# Altium PCB Flight_Controller_PCB.PcbDoc
Units mm, origin at the board's own origin, x right, y up, seen from the top; angles counter-clockwise.
Board outline 52 x 49 mm, 4 copper layers (L1 (Sig), L2 (GND), L3 (GND), L4 (Sig)), stack 1.57 mm thick; 56 components, 34 nets, 244 pads, 103 vias.
Unrouted connection lines stored in the file: 1.
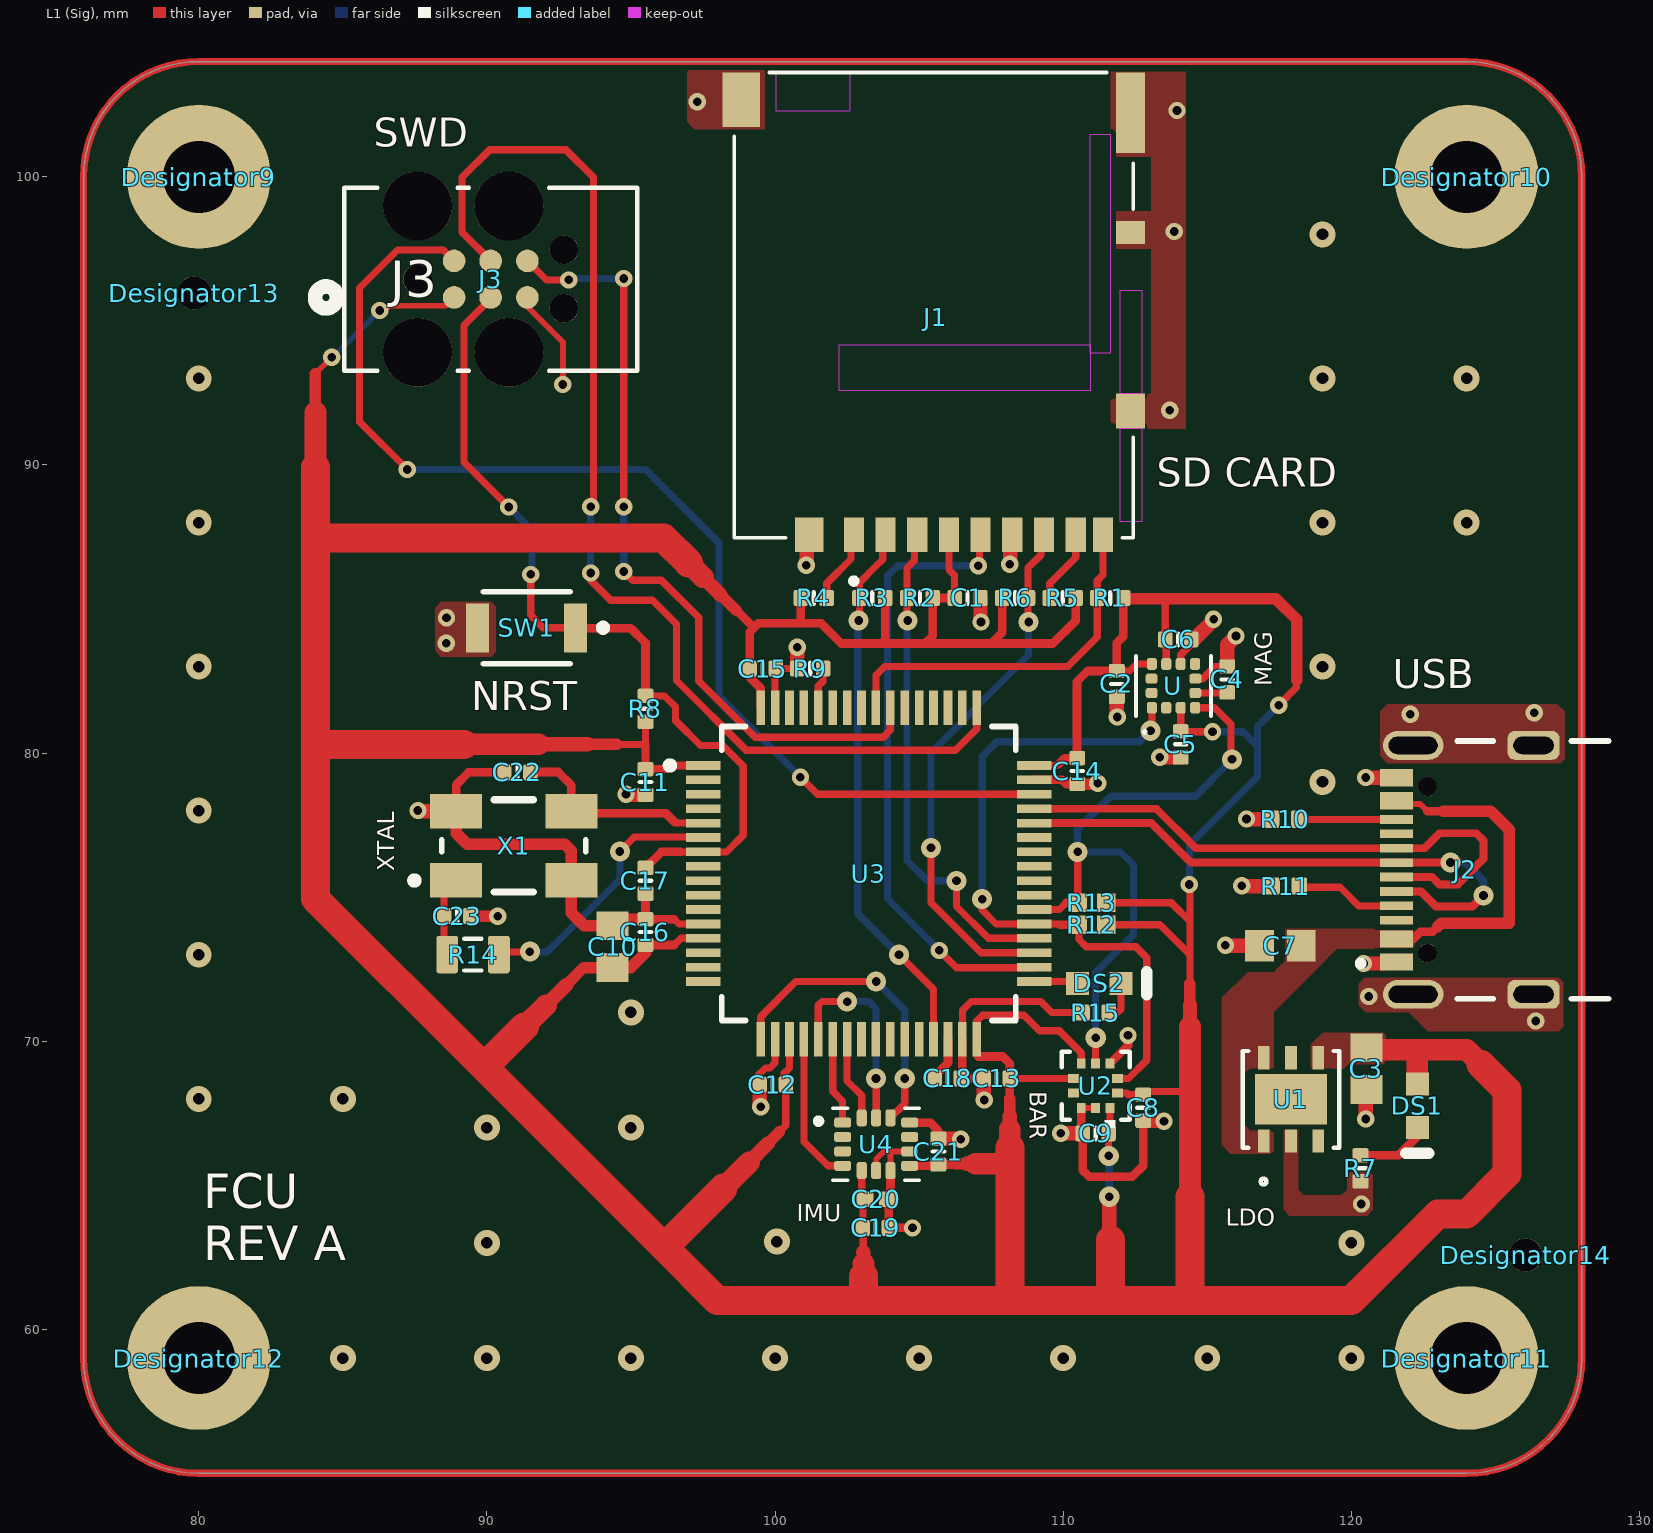
[diagram p0: L1 (Sig) view]
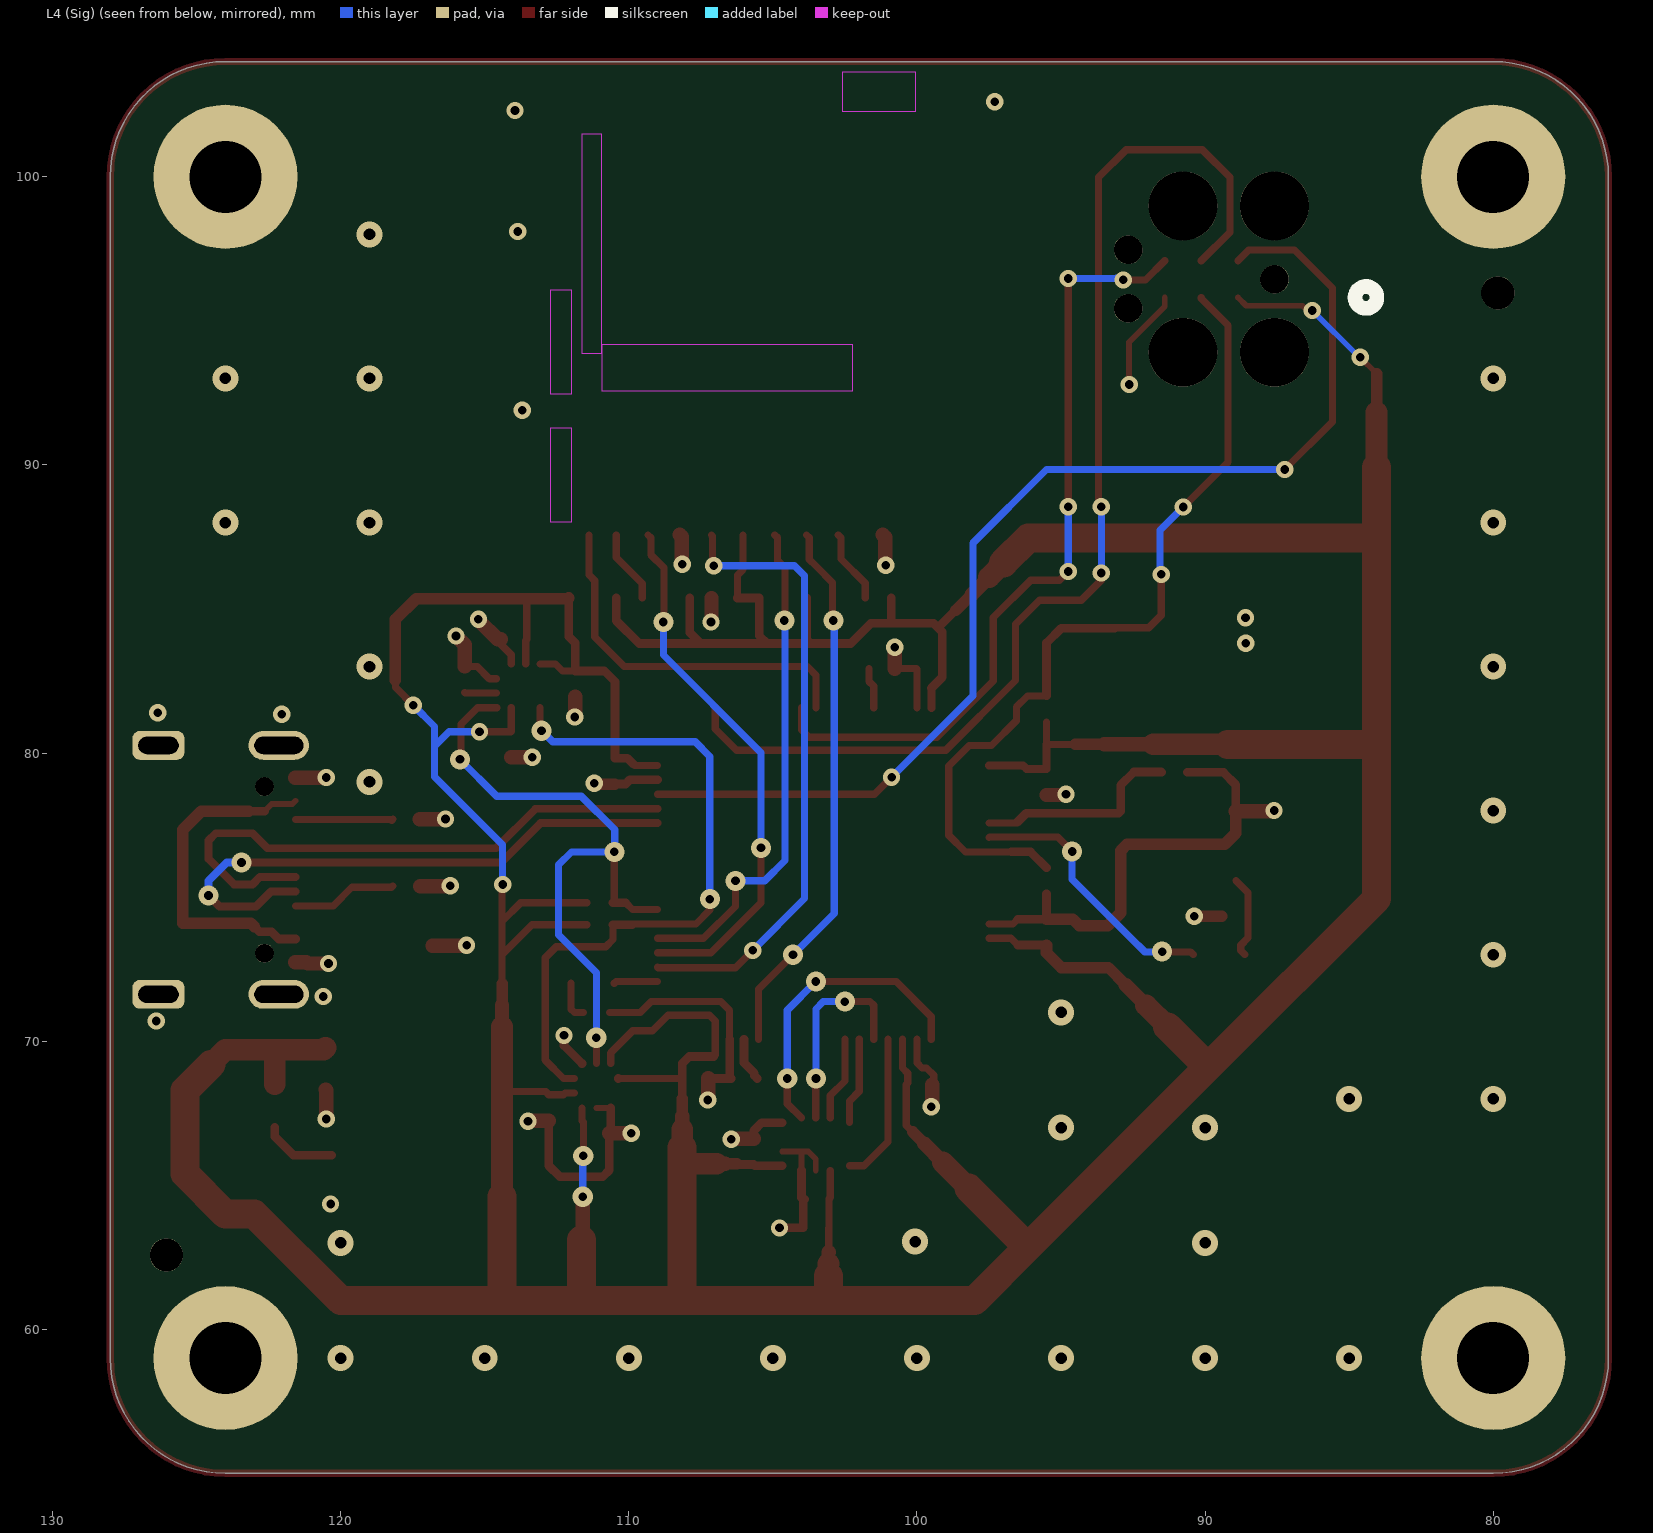
[diagram p1: L4 (Sig) view, seen from below]
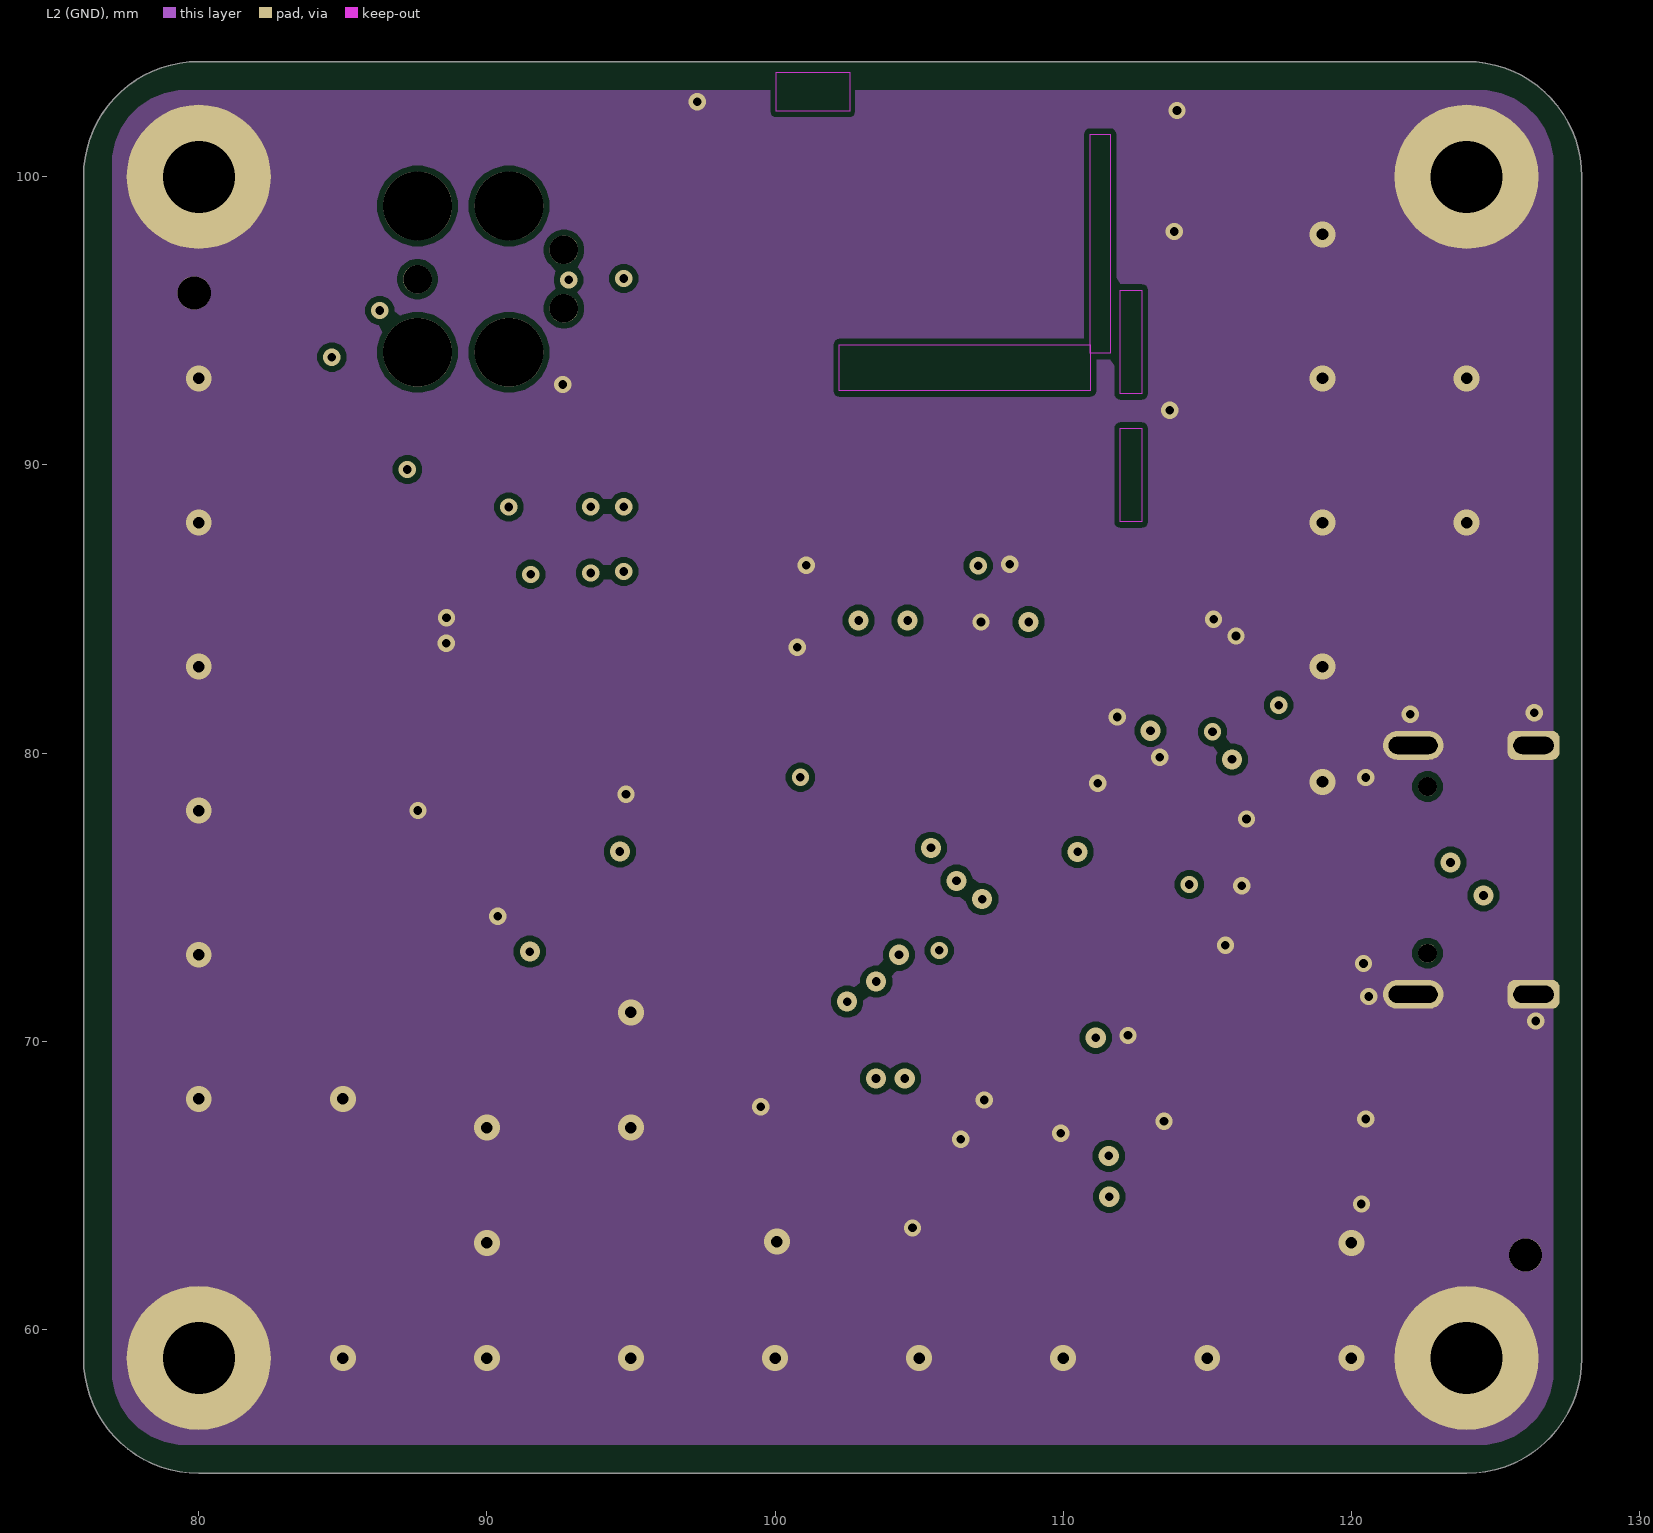
[diagram p2: L2 (GND)]
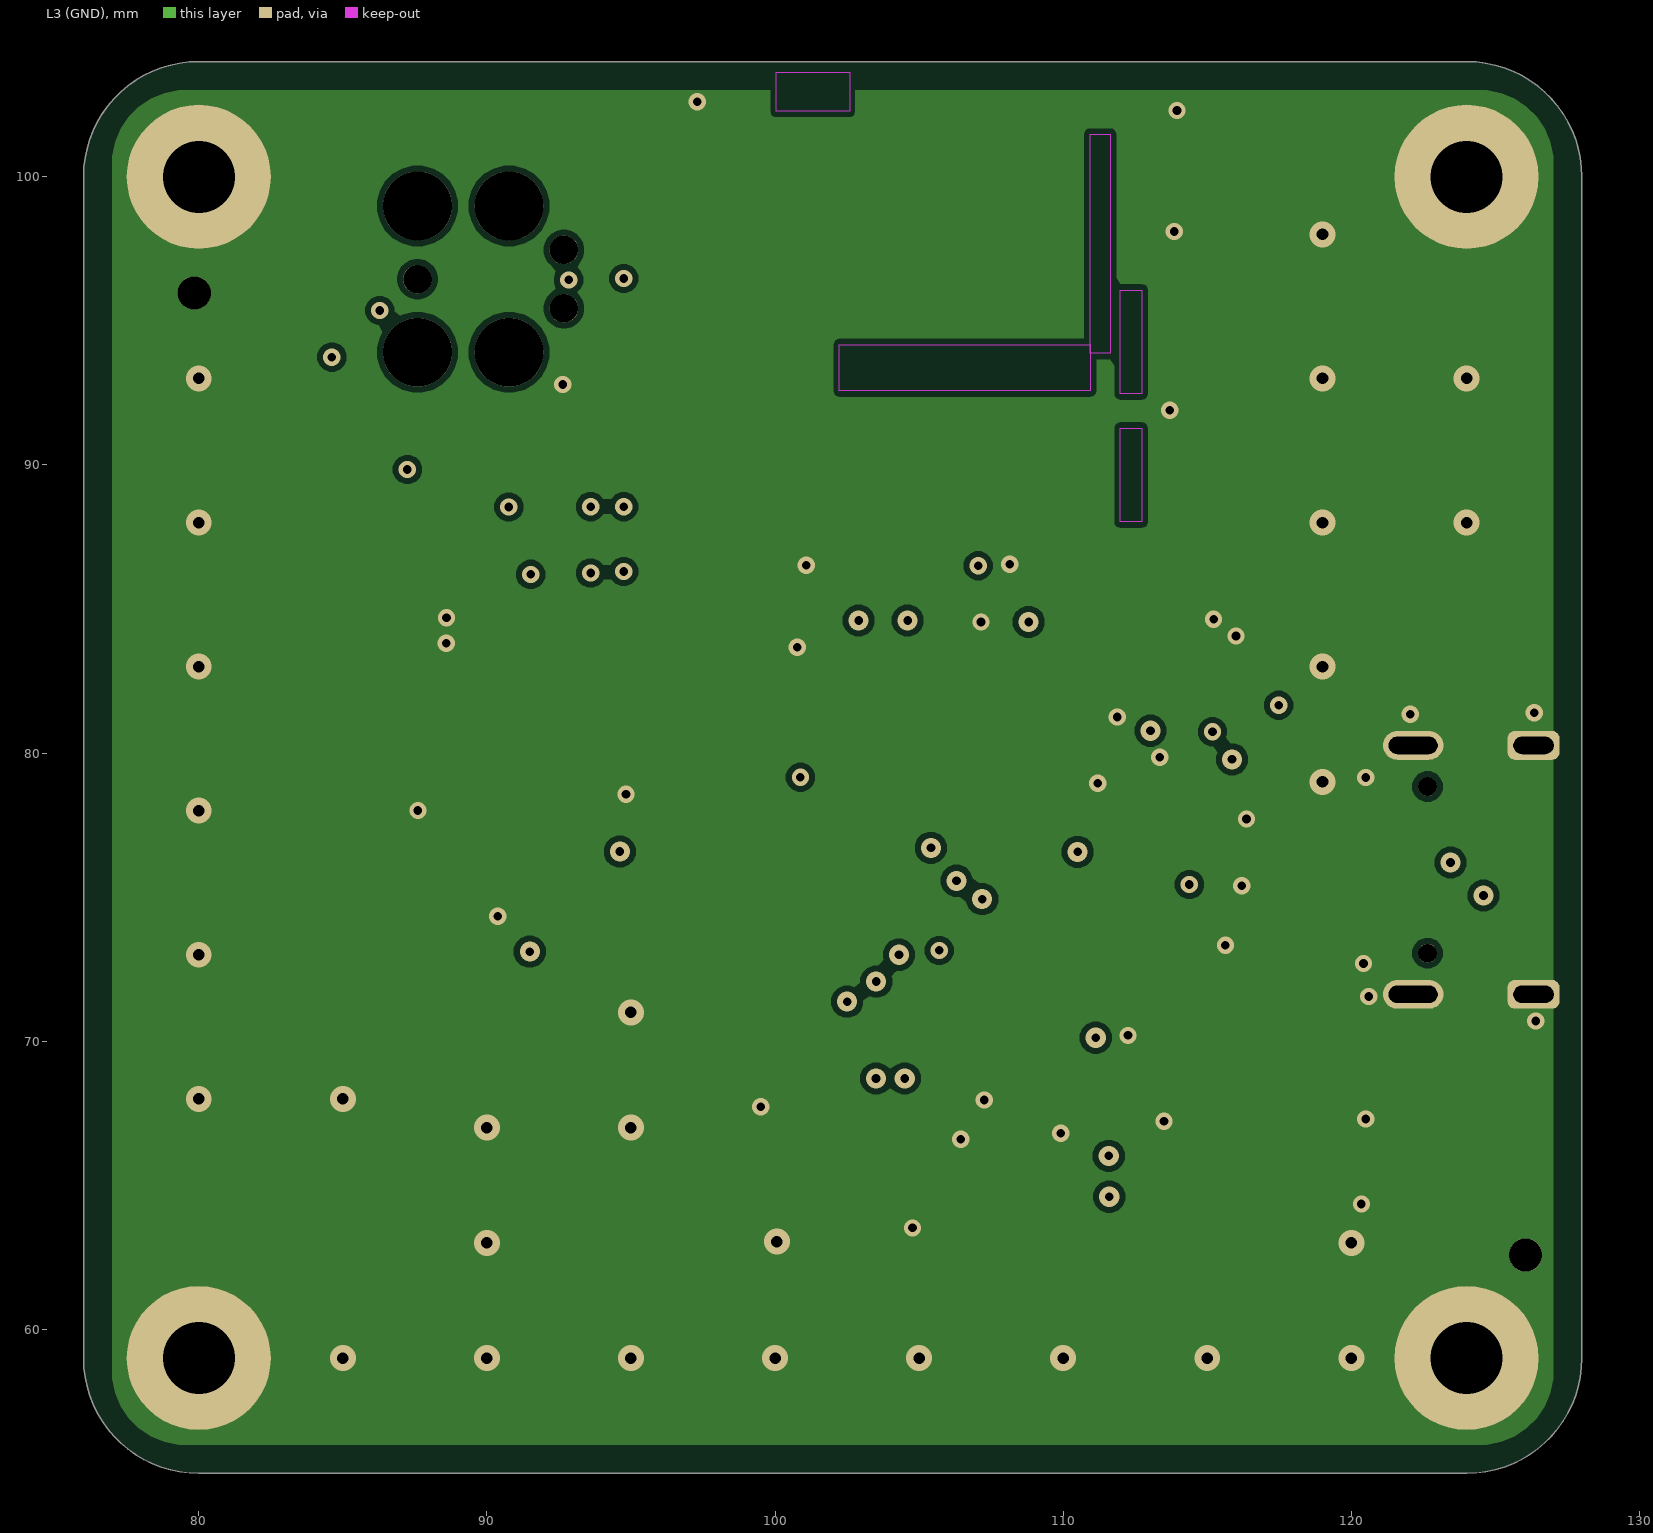
[diagram p3: L3 (GND)]
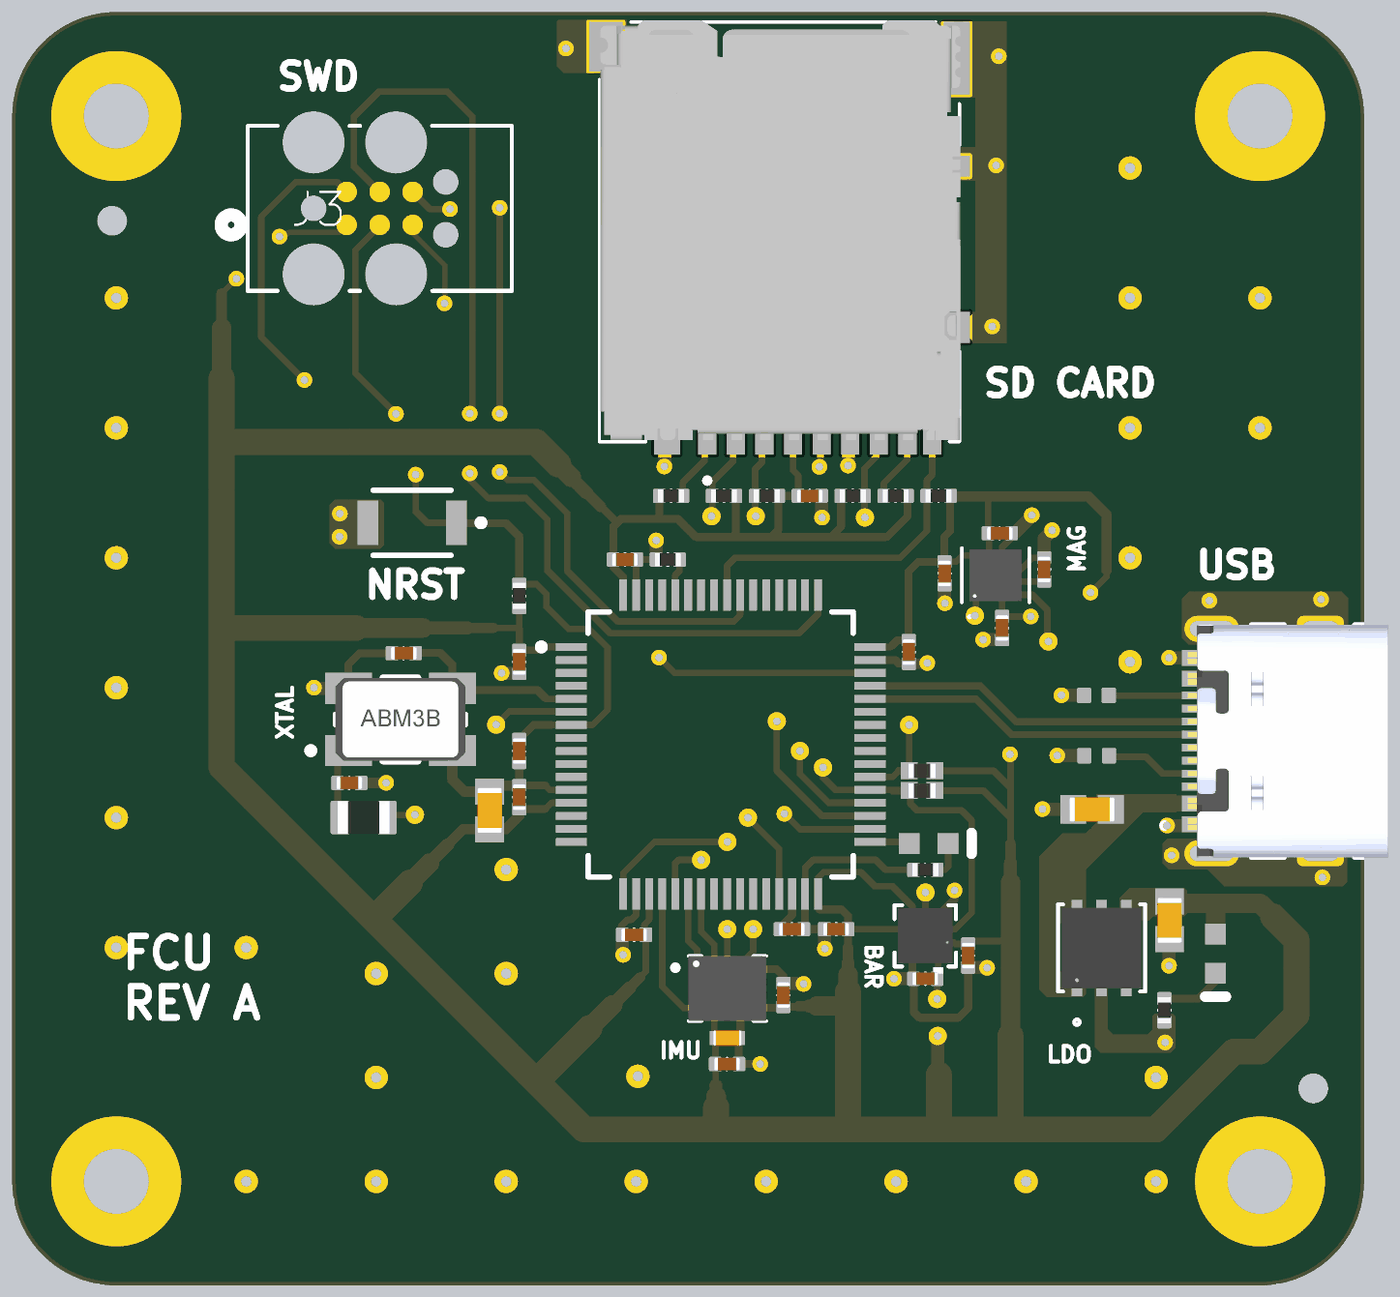
[diagram p4: 3D render of the assembled board from above, using the file's embedded part models]

## Layer stack, top to bottom
Top Solder: solder mask 0.0254, SM-001, Dk 3.8
L1 (Sig): signal copper 0.035
Dielectric 1: prepreg 0.2, PP-017, Dk 4.4
L2 (GND): signal copper 0.0175
Dielectric 3: core 1.065, Core-039, Dk 4.6
L3 (GND): signal copper 0.0175
Dielectric 5: prepreg 0.2, PP-017, Dk 4.4
L4 (Sig): signal copper 0.035
Bottom Solder: solder mask 0.0254, SM-001, Dk 3.8

## Board outline
76,59 ccw(c80,59) 80,55 124,55 ccw(c124,59) 128,59 128,100 ccw(c124,100) 124,104 80,104 ccw(c80,100) 76,100

## Design rules (kind name [scope] priority, off if disabled: settings)
Clearance [All] p1: gap=0.2 ignorepadtopadclearanceinfootprint=FALSE
DiffPairsRouting [All] p1: maxlimit=0.254 minlimit=0.203 mostfreqgap=0.254 toplayer_maxgap=0.203 toplayer_prefgap=0.203 toplayer_minwidth=0.273 toplayer_maxwidth=0.273 toplayer_prefwidth=0.273 bottomlayer_maxgap=0.203 bottomlayer_prefgap=0.203 bottomlayer_minwidth=0.273 bottomlayer_maxwidth=0.273 bottomlayer_prefwidth=0.273 impedanceprofiledriven=TRUE impedanceprofileid={28CD22B4-C1F1-4255-A6FB-8855A802A686} impedanceprofilevalue=90.000000 maxuncoupledlength=12.7
PolygonConnect [All] p1: connectstyle=Direct reliefconductorwidth=0.254 reliefentries=4 polygonreliefangle="90 Angle" airgapwidth=0.254
RoutingVias [All] p1: holewidth=0.3 width=0.7 viastyle="Through Hole" minholewidth=0.25 minwidth=0.55 maxholewidth=0.4 maxwidth=0.9
SolderMaskExpansion [All] p1: expansion=0 istentingtop=FALSE
SupplyNets "Schematic Supply Nets_1" [InNet('3V3')] p1: voltage=0.000
SupplyNets "Schematic Supply Nets" [InNet('GND')] p2: voltage=0.000
UnRoutedNet [All] p1: checkbadconnections=TRUE
UnpouredPolygon [All] p1: allowshelved=TRUE
Width [All] p1: maxlimit=1 minlimit=0.2 preferedwidth=0.3 midlayer1_minwidth=0.254 midlayer1_maxwidth=0.254 midlayer1_prefwidth=0.254 midlayer2_minwidth=0.254 midlayer2_maxwidth=0.254 midlayer2_prefwidth=0.254 minimp=50.000000 maximp=50.000000 favimp=50.000000
27 further rules are at their usual default settings.

## Classes and differential pairs
component class Flight_Controller_SCH: C1 C2 C3 C4 C5 C6 C7 C8 C9 C10 C11 C12 C13 C14 C15 C16 C17 C18 C19 C20 C21 C22 C23 DS1 DS2 J1 J2 J3 R1 R2 R3 R4 R5 R6 R7 R8 R9 R10 R11 R12 R13 R14 R15 SW1 U U1 U2 U3 U4 X1
differential pair USB: +USB_P -USB_N

## Components (designator, comment, footprint, x,y, rotation, side; value= is the part's Value field where it differs from the comment)
C1 "Capacitor 100nF +/-20% 25V 0402" CAPC0402(1005)60_L 106.68,85.381 r0 top value=100nF
C2 "Capacitor 10nF +/-20% 50V 0402" CAPC0402(1005)60_L 111.862,82.397 r270 top value=10nF
C3 "Capacitor 1uF +/- 10% 16V 0603" CAPC1608X90X35ML15T15 120.525,69.048 r270 top value=1µF
C4 "Capacitor 100nF +/-20% 25V 0402" CAPC0402(1005)60_L 115.696,82.553 r90 top value=100nF
C5 "Capacitor 100nF +/-20% 25V 0402" CAPC0402(1005)60_L 114.082,80.3 r270 top value=100nF
C6 "Capacitor 100nF +/-20% 25V 0402" CAPC0402(1005)60_L 113.991,83.946 r0 top value=100nF
C7 "Capacitor 1uF +/- 10% 16V 0603" CAPC1608X90X35ML15T15 117.537,73.316 r180 top value=1µF
C8 "Capacitor 100nF +/-20% 25V 0402" CAPC0402(1005)60_L 112.776,67.691 r270 top value=100nF
C9 "Capacitor 100nF +/-20% 25V 0402" CAPC0402(1005)60_L 111.125,66.802 r180 top value=100nF
C10 "Capacitor 1uF +/- 10% 16V 0603" CAPC1608X90X35ML15T15 94.361,73.279 r90 top value=1µF
C11 "Capacitor 100nF +/-20% 25V 0402" CAPC0402(1005)60_L 95.504,78.994 r270 top value=100nF
C12 "Capacitor 100nF +/-20% 25V 0402" CAPC0402(1005)60_L 99.922,68.493 r180 top value=100nF
C13 "Capacitor 100nF +/-20% 25V 0402" CAPC0402(1005)60_L 107.696,68.707 r180 top value=100nF
C14 "Capacitor 100nF +/-20% 25V 0402" CAPC0402(1005)60_L 110.49,79.375 r270 top value=100nF
C15 "Capacitor 100nF +/-20% 25V 0402" CAPC0402(1005)60_L 99.568,82.931 r0 top value=100nF
C16 "Capacitor 100nF +/-20% 25V 0402" CAPC0402(1005)60_L 95.504,73.787 r90 top value=100nF
C17 "Capacitor 100nF +/-20% 25V 0402" CAPC0402(1005)60_L 95.504,75.566 r270 top value=100nF
C18 "Capacitor 2,2µF +/-20% 10V 0402" CAPC0402(1005)60_L 105.992,68.707 r0 top value=2µ2
C19 "Capacitor 10nF +/-20% 50V 0402" CAPC0402(1005)60_L 103.5,63.52 r0 top value=10nF
C20 "Capacitor 0.1 uF +/- 5% 16 V 0402" CAPC1005X56X25LL10T15 103.509,64.52 r0 top value=100nF
C21 "Capacitor 2,2µF +/-20% 10V 0402" CAPC0402(1005)60_L 105.668,66.171 r90 top value=2µ2
C22 "Capacitor 22pF +/-10% 50V 0402" CAPC0402(1005)60_L 91.061,79.329 r180 top value=22pF
C23 "Capacitor 22pF +/-10% 50V 0402" CAPC0402(1005)60_L 88.966,74.339 r0 top value=22pF
Designator9 "Comment" PTH-M2D5X5#1 80,100 r0 top
Designator10 "Comment" PTH-M2D5X5#1 124,100 r0 top
Designator11 "Comment" PTH-M2D5X5#1 124,59 r0 top
Designator12 "Comment" PTH-M2D5X5#1 80,59 r0 top
Designator13 "Comment" PTH-M2D5X5#2 79.84,95.97 r0 top
Designator14 "Comment" PTH-M2D5X5#2 126.05,62.58 r0 top
DS1 "HSMG-C190" AVAG-HSMX-C190_V 122.289,67.761 r270 top
DS2 "HSMD-C190" AVAG-HSMX-C190_V 111.252,72.009 r0 top
J1 "DM3AT-SF-PEJM5" HRS_DM3AT-SF-PEJM5 105.51,95.545 r180 top
J2 "USB4105-GF-A-120" GCT_USB4105-GF-A-120 126.325,75.946 r90 top
J3 "TC2030-IDC" CONN_TC2030-IDC_TGC 90.132,96.447 r0 top
R1 "Resistor 10K  +/-1 % 0402 63 mW" RESC0402(1005)_L 111.633,85.381 r0 top value=10k
R2 "Resistor 10K  +/-1 % 0402 63 mW" RESC0402(1005)_L 105.029,85.381 r0 top value=10k
R3 "Resistor 10K  +/-1 % 0402 63 mW" RESC0402(1005)_L 103.378,85.381 r0 top value=10k
R4 "Resistor 10K  +/-1 % 0402 63 mW" RESC0402(1005)_L 101.346,85.381 r180 top value=10k
R5 "Resistor 10K  +/-1 % 0402 63 mW" RESC0402(1005)_L 109.982,85.381 r0 top value=10k
R6 "Resistor 10K  +/-1 % 0402 63 mW" RESC0402(1005)_L 108.331,85.381 r180 top value=10k
R7 "Resistor 10K  +/-1 % 0402 63 mW" RESC0402(1005)_L 120.319,65.587 r270 top value=200
R8 "Resistor 10K  +/-1 % 0402 63 mW" RESC0402(1005)_L 95.504,81.534 r90 top value=10k
R9 "Resistor 10K  +/-1 % 0402 63 mW" RESC0402(1005)_L 101.219,82.931 r180 top value=10k
R10 "0402WGF5101TCE" RESC1005X40N 117.708,77.706 r180 top value=5.1k
R11 "0402WGF5101TCE" RESC1005X40N 117.718,75.384 r180 top value=5.1k
R12 "Resistor 4k7 +/-1% 0402 100 mW" RESC1005X40X25ML05T05 110.998,74.041 r180 top value=4.7k
R13 "Resistor 4k7 +/-1% 0402 100 mW" RESC1005X40X25ML05T05 110.998,74.803 r180 top value=4.7k
R14 "Resistor 470R +/-5% 0805 125 mW" RESC0805(2012)_L 89.514,73.006 r180 top value=470
R15 "Resistor 1K +/-5 % 0402 63 mW" RESC0402(1005)_L 111.125,70.993 r180 top value=1k
SW1 "B3U-1000P" OMRON-B3U-1000_V 91.38,84.348 r180 top
U "LIS2MDLTR" LIS2MDLTR 113.828,82.332 r90 top
U1 "LD39100PU33R" DFN_00PU33R_STM 117.906,67.984 r90 top
U2 "BMP581" QFN10_BMP581_BOS-M 111.125,68.453 r180 top
U3 "STM32F446RET6" FP-LQFP64-5W-MFG 103.251,75.819 r0 top
U4 "ICM-42688-P" ICM-42688-P 103.509,66.425 r0 top
X1 "ABM3B-12.000MHZ-B2-T" ABRA-ABM3B-4_V 90.932,76.778 r0 top

## Footprints (in the part's own frame and the unit in brackets; to place one, negate y for a bottom-side part, rotate by r counter-clockwise, add the part's x,y. Pads: shape width x height; smd on the part's side, far side on the other; paste and mask are expansions set on the pad)
ABRA-ABM3B-4_V [mm] "SMD, 4-Leads, Body 5x3.2mm"
  rect 1.8x1.2 smd: 1(-2,-1.2) 2(2,-1.2) 3(2,1.2) 4(-2,1.2)
  silkscreen extent -3.57,-1.6 2.5,1.6, body extent -2.5,-1.59 2.5,1.59, height 1.13
AVAG-HSMX-C190_V [mm] "SMD, 2-Leads, Body 1.6x0.8mm, Height 0.9mm"
  rect 0.8x0.8 smd: 1(-0.75,0) 2(0.75,0)
  silkscreen extent 1.65,-0.4 1.65,0.4, body extent -0.8,-0.4 0.8,0.4, height 0.9
CAPC0402(1005)60_L [mm] "Chip Capacitor, Body 1.0x0.5mm, Height 0.6mm, IPC High Density"
  rrect25% 0.5x0.55 smd: 1(-0.45,0) 2(0.45,0)
  silkscreen extent 0,-0.2 0,0.2, body extent -0.5,-0.25 0.5,0.25, height 0.6
CAPC1005X56X25LL10T15 [mm] "Chip Capacitor, 2-Leads, Body 1.10x0.60mm, IPC High Density"
  rect 0.58x0.54 smd: 1(-0.39,0) 2(0.39,0)
  body extent -0.55,-0.3 0.55,0.3, height 0.56
CAPC1608X90X35ML15T15 [mm] "Chip Capacitor, 2-Leads, Body 1.75x0.95mm, IPC Low Density"
  rect 1x1.1 smd: 1(-0.725,0) 2(0.725,0)
  body extent -0.87,-0.48 0.87,0.48, height 0.9
CONN_TC2030-IDC_TGC [mil]
  round 31 smd paste-15.5 mask+0: 1(-50,-25) 2(-50,25) 3(0,-25) 4(0,25) 5(50,-25) 6(50,25)
  round 39 hole 39 unplated paste-99999 mask+0: 7(-100,0) 8(100,40) 9(100,-40)
  round 94 hole 94 unplated paste-99999 mask+0: 10(-100,100) 11(25,100) 12(-100,-100) 13(25,-100)
  silkscreen extent -240,-125 200,125
DFN_00PU33R_STM [mil]
  rect 32x16 smd paste+0 mask+0: 1(-57,37.4) 2(-57,0) 3(-57,-37.4) 4(57,-37.4) 5(57,0) 6(57,37.4)
  rect 69x98 smd paste+0 mask+0: 7(0,0)
  silkscreen extent -116,-66 66,66, body extent -61,-61 61,61, height 32
FP-LQFP64-5W-MFG [mm]
  rect 1.2x0.3 smd paste+0 mask+0: 1(-5.75,3.75) 2(-5.75,3.25) 3(-5.75,2.75) 4(-5.75,2.25) 5(-5.75,1.75) 6(-5.75,1.25) 7(-5.75,0.75) 8(-5.75,0.25) 9(-5.75,-0.25) 10(-5.75,-0.75) 11(-5.75,-1.25) 12(-5.75,-1.75) 13(-5.75,-2.25) 14(-5.75,-2.75) 15(-5.75,-3.25) 16(-5.75,-3.75) 33(5.75,-3.75) 34(5.75,-3.25) 35(5.75,-2.75) 36(5.75,-2.25) 37(5.75,-1.75) 38(5.75,-1.25) 39(5.75,-0.75) 40(5.75,-0.25) 41(5.75,0.25) 42(5.75,0.75) 43(5.75,1.25) 44(5.75,1.75) 45(5.75,2.25) 46(5.75,2.75) 47(5.75,3.25) 48(5.75,3.75)
  rect 0.3x1.2 smd paste+0 mask+0: 17(-3.75,-5.75) 18(-3.25,-5.75) 19(-2.75,-5.75) 20(-2.25,-5.75) 21(-1.75,-5.75) 22(-1.25,-5.75) 23(-0.75,-5.75) 24(-0.25,-5.75) 25(0.25,-5.75) 26(0.75,-5.75) 27(1.25,-5.75) 28(1.75,-5.75) 29(2.25,-5.75) 30(2.75,-5.75) 31(3.25,-5.75) 32(3.75,-5.75) 49(3.75,5.75) 50(3.25,5.75) 51(2.75,5.75) 52(2.25,5.75) 53(1.75,5.75) 54(1.25,5.75) 55(0.75,5.75) 56(0.25,5.75) 57(-0.25,5.75) 58(-0.75,5.75) 59(-1.25,5.75) 60(-1.75,5.75) 61(-2.25,5.75) 62(-2.75,5.75) 63(-3.25,5.75) 64(-3.75,5.75)
  silkscreen extent -7.02,-5.1 5.1,5.1
GCT_USB4105-GF-A-120 [mm]
  rect 0.6x1.15 smd: A1_B12(-3.2,4.755) A4_B9(-2.4,4.755) B1_A12(3.2,4.755) B4_A9(2.4,4.755)
  rect 0.3x1.15 smd: A5(-1.25,4.755) A6(-0.25,4.755) A7(0.25,4.755) A8(1.25,4.755) B5(1.75,4.755) B6(0.75,4.755) B7(-0.75,4.755) B8(-1.75,4.755)
  oval 1x2.1 hole 0.6 slot 1.7 at 90 deg: SH1(-4.32,4.18) SH2(4.32,4.18)
  rrect50% 1x1.8 hole 0.6 slot 1.4 at 90 deg: SH3(-4.32,0) SH4(4.32,0)
  round 0.65 hole 0.65 unplated: ""(-2.89,3.68) ""(2.89,3.68)
  silkscreen extent -4.47,-2.6 4.47,6.1, body extent -4.47,-2.6 4.47,5.11, height 3.31
HRS_DM3AT-SF-PEJM5 [mm]
  rect 0.7x1.2 smd paste+0 mask+0.102: 1(2.775,7.975) 2(1.675,7.975) 3(0.575,7.975) 4(-0.525,7.975) 5(-1.625,7.975) 6(-2.725,7.975) 7(-3.825,7.975) 8(-4.925,7.975) SWB(-5.875,7.975)
  rect 1x1.2 smd paste+0 mask+0.102: P1(-6.825,3.675) P4(4.325,7.975)
  rect 1x2.8 smd paste+0 mask+0.102: P2(-6.825,-6.675)
  rect 1.3x1.9 smd paste+0 mask+0.102: P3(6.675,-7.125)
  rect 1x0.8 smd paste+0 mask+0.102: SWA(-6.825,-2.525)
  Keep-Out Layer region: -5.425,-5.925 -6.125,-5.925 -6.125,1.675 -5.425,1.675
  Keep-Out Layer region: 3.275,1.375 -5.425,1.375 -5.425,2.975 3.275,2.975
  Keep-Out Layer region: 5.475,-8.075 2.925,-8.075 2.925,-6.725 5.475,-6.725
  Keep-Out Layer region: -6.475,4.275 -7.225,4.275 -7.225,7.525 -6.475,7.525
  Keep-Out Layer region: -6.475,-0.525 -7.225,-0.525 -7.225,3.075 -6.475,3.075
  silkscreen extent -6.93,-8.08 6.93,9.67, body extent -6.96,-8.13 6.89,8.02, height 1.68
ICM-42688-P [mm]
  rrect50% 0.59x0.35 smd mask+0: 1(-1.165,0.75) 2(-1.165,0.25) 3(-1.165,-0.25) 4(-1.165,-0.75) 8(1.165,-0.75) 9(1.165,-0.25) 10(1.165,0.25) 11(1.165,0.75)
  rrect50% 0.35x0.59 smd mask+0: 5(-0.5,-0.915) 6(0,-0.915) 7(0.5,-0.915) 12(0.5,0.915) 13(0,0.915) 14(-0.5,0.915)
  silkscreen extent -2.1,-1.25 1.5,1.25, body extent -1.5,-1.25 1.5,1.25, height 0.97
LIS2MDLTR [mm]
  rrect50% 0.41x0.35 smd: 1(-0.76,0.75) 2(-0.76,0.25) 3(-0.76,-0.25) 4(-0.76,-0.75) 7(0.76,-0.75) 8(0.76,-0.25) 9(0.76,0.25) 10(0.76,0.75)
  rrect50% 0.35x0.41 smd: 5(-0.25,-0.76) 6(0.25,-0.76) 11(0.25,0.76) 12(-0.25,0.76)
  silkscreen extent -1.65,-1.3 1.05,1.3, body extent -1,-1 1,1, height 0.7
OMRON-B3U-1000_V [mm] "SMD, 2-Leads, Body 3x2.5mm"
  rect 0.8x1.7 smd: 1(-1.7,0) 2(1.7,0)
  silkscreen extent -2.78,-1.25 1.5,1.25, body extent -1.5,-1.25 1.5,1.25, height 1.75
PTH-M2D5X5#1 [mm]
  round 5 hole 2.5: 1(0,0)
PTH-M2D5X5#2 [mm]
  round 1.152 hole 1.152 unplated: 1(0,0)
QFN10_BMP581_BOS-M [mil]
  rect 15x12 smd paste+0 mask+0: 1(-29.93,9.84) 2(-29.93,-9.84) 6(29.93,-9.84) 7(29.93,9.84)
  rect 12x14 smd paste+0 mask+0: 3(-19.69,-30.43) 4(0,-30.43) 5(19.69,-30.43) 8(19.69,30.43) 9(0,30.43) 10(-19.69,30.43)
  silkscreen extent -47,-47 47,57, body extent -41,-41 41,41, height 32
RESC0402(1005)_L [mm] "Chip Resistor, Body 1.0x0.5mm, IPC High Density"
  rrect25% 0.5x0.55 smd: 1(-0.45,0) 2(0.45,0)
  silkscreen extent 0,-0.2 0,0.2, body extent -0.5,-0.25 0.5,0.25, height 0.3
RESC0805(2012)_L [mm] "Chip Resistor, Body 2.0x1.3mm, IPC High Density"
  rrect25% 0.76x1.3 smd: 1(-0.9,0) 2(0.89,0)
  silkscreen extent -0.3,-0.55 0.3,0.55, body extent -1,-0.62 1,0.63, height 0.6
RESC1005X40N [mm] "Chip Resistor, 2-Leads, Body 1.00x0.50mm, IPC Medium Density"
  rrect25% 0.55x0.6 smd: 1(-0.475,0) 2(0.475,0)
  body extent -0.5,-0.25 0.5,0.25, height 0.4
RESC1005X40X25ML05T05 [mm] "Chip Resistor, 2-Leads, Body 1.05x0.55mm, IPC Low Density"
  rect 0.65x0.65 smd: 1(-0.5,0) 2(0.5,0)
  body extent -0.53,-0.28 0.53,0.28, height 0.4

## Part data
C1 C4 C5 C6 C8 C9 C11 C12 C13 C14 C15 C16 C17: library part CMP-001-00065-4, "Chip Capacitor, 100nF +/-20%, 25V, 0402, Thickness 0.6 mm", Case/Package=0402, Max Operating Temperature=85°C, Min Operating Temperature=-55°C, Tolerance=10%, Voltage Rating=25V, Mounting Technology=SMT, Pins=2
C2 C19: library part CMP-001-00069-3, "Chip Capacitor, 10nF +/-20%, 50V, 0402, Thickness 0.6 mm", Case/Package=0402, Max Operating Temperature=85°C, Min Operating Temperature=-55°C, Tolerance=5%, Voltage Rating=50V, Mounting Technology=SMT, Pins=2
C3 C7 C10: library part CMP-001-00004-6, "Chip Capacitor, 1 uF, +/- 10%, 16 V, 0603 (1608 Metric)", Capacitor Type=Ceramic, Case/Package=0603, Max Operating Temperature=125°C, Min Operating Temperature=-55°C, Tolerance=10%, Voltage Rating=16V, Mounting Technology=SM, Pins=2, RoHS Compliant=True
C18 C21: library part CMP-001-00056-4, "Chip Capacitor, 2,2µF +/-20%, 10V, 0402, Thickness 0.6 mm", Case/Package=0402, Max Operating Temperature=85°C, Min Operating Temperature=-55°C, Tolerance=10%, Voltage Rating=10V, Mounting Technology=SMT, Pins=2
C20: library part CMP-001-00001-6, "Chip Capacitor, 0.1 uF, +/- 5%, 16 V, 0402 (1005 Metric)", Capacitor Type=Ceramic, Case/Package=0402, Max Operating Temperature=125°C, Min Operating Temperature=-55°C, Tolerance=5%, Voltage Rating=16V, Mounting Technology=SM, Pins=2, RoHS Compliant=True
C22 C23: library part CMP-001-00073-3, "Chip Capacitor, 22pF +/-10%, 50V, 0402, Thickness 0.6 mm", Case/Package=0402, Max Operating Temperature=85°C, Min Operating Temperature=-55°C, Tolerance=10%, Voltage Rating=50V, Mounting Technology=SMT, Pins=2
DS1: library part CMP-007-00013-2, "LED Uni-Color Green, 52 mW, 20 mA, -40 to 85 degC, 2-Pin SMD, RoHS, Tape and Reel", Case/Package=0603, Colour=Green, Forward Current=20mA, Forward Voltage=2.2V, Manufacturer=Avago, Max Operating Temperature=85°C, Min Operating Temperature=-40°C, Package Description="2-Pin Surface Mount Device, Body 1.6 x 0.8 mm, Height 0.9 mm", Package Quantity=4000, Package Reference=HSMX-C190, Power=52mW, Datasheet URL=http://docs.avagotech.com/docs/AV02-0551EN, Datasheet Version=Mar-12, Illumination Colour=Green, Lens Style=Diffused, Luminous Intensity=15mcd, Manufacturer URL=http://www.avagotech.com/, Mounting Technology=SM, Nominal Vf=2.2V, Packaging=TapeandReel, Pins=2, RoHS Compliant=True, Viewing Angle=170degrees
DS2: library part CMP-007-00012-2, "LED Uni-Color Orange, 52 mW, 20 mA, -40 to 85 degC, 2-Pin SMD, RoHS, Tape and Reel", Case/Package=0603, Colour=Orange, Forward Current=20mA, Forward Voltage=2.2V, Manufacturer=Avago, Max Operating Temperature=85°C, Min Operating Temperature=-40°C, Package Description="2-Pin Surface Mount Device, Body 1.6 x 0.8 mm, Height 0.9 mm", Package Quantity=4000, Package Reference=HSMX-C190, Power=52mW, Datasheet URL=http://docs.avagotech.com/docs/AV02-0551EN, Datasheet Version=Mar-12, Illumination Colour=Orange, Lens Style=Diffused, Luminous Intensity=8mcd, Manufacturer URL=http://www.avagotech.com/, Mounting Technology=SM, Nominal Vf=2.2V, Packaging=TapeandReel, Pins=2, RoHS Compliant=True, Viewing Angle=170degrees
J1: "10 (8 + 2) Position Card Connector Secure Digital - microSDâ„¢ Surface Mount, Right Angle Gold", Manufacturer="Hirose Electric Co Ltd", Datasheet=https://www.hirose.com/product/document?clcode=CL0609-0033-6-00&productname=DM3AT-SF-PEJ2M5&series=DM3&documenttype=Catalog&lang=en&documentid=D49662_en, Link=https://www.digikey.com/en/products/detail/hirose-electric-co-ltd/DM3AT-SF-PEJM5/2533565, Price=$3.18000
J2: library part CMP-002-00071-1, "USB CONN, 2.0 TYPE C, RCPT, 16POS, SMT; USB Connector Type:USB Type C; USB Standard:USB 2.0; Gender:Receptacle; No. of Positions:16Positions; Connector Mounting:Surface Mount, Through Hole Mount; Orientation:Right Angle RoHS Compliant: Yes", Datasheet=https://gct.co/files/specs/usb4105-spec.pdf, MF="Global Connector Technology", Price=$0.80000
J3: "Description", Datasheet=https://mm.digikey.com/Volume0/opasdata/d220001/medias/docus/2084/TC2030-IDC_RevB.pdf, Link=https://www.digikey.com/en/products/detail/tag-connect-llc/TC2030-IDC/4571121, MFN=TC2030-IDC, Price=$44.58000
R1 R2 R3 R4 R5 R6 R7 R8 R9: library part CMP-009-00149-3, "Chip Resistor, 10 kOhms, +/-1 %, 63 mW, -55 to 125 degC, 0402", Case/Package=0402, Max Operating Temperature=155°C, Min Operating Temperature=-55°C, Power=63mW, Tolerance=1%, Pins=2
R10 R11: library part CMP-009-00177-1, "Res Thick Film 0402 5.1K Ohm 1% 0.063W(1/16W) ±100ppm/C Pad SMD T/R", Case/Package=0402, Tolerance=1%
R12 R13: library part CMP-009-00030-5, "Chip Resistor, 4.7 KOhm, +/- 1%, 0.1 W, -55 to 155 degC, 0402 (1005 Metric)", Case/Package=0402, Max Operating Temperature=155°C, Min Operating Temperature=-55°C, Power=100mW, Tolerance=1%, Voltage Rating=50V, Mounting Technology=SM, Pins=2, RoHS Compliant=True
R14: library part CMP-009-00122-3, "Chip Resistor, 470 Ohms, +/-5%, 125 mW, -55 to 155 degC, 0805", Case/Package=0805, Max Operating Temperature=155°C, Min Operating Temperature=-55°C, Power=125mW, Tolerance=5%, Pins=2
R15: library part CMP-009-00157-3, "Chip Resistor, 1 kOhms, +/-5 %, 63 mW, -55 to 155 degC, 0402", Case/Package=0402, Max Operating Temperature=155°C, Min Operating Temperature=-55°C, Power=63mW, Tolerance=5%, Pins=2
SW1: library part CMP-011-00000-2, "Tactile Switch, SPST-NO, 0.05 A, 12 V, -25 to 70 degC, 2-Pin SMD, RoHS, Tape and Reel", Case/Package=B3U-1000, Contact Current Rating=50mA, IP Rating=IP40, Manufacturer="Omron Electronic Components", Max Contact Resistance=100mohm, Max Operating Temperature=70°C, Max Voltage Rating (DC)=12V, Min Operating Temperature=-25°C, Operating Force=153gf, Package Description="2-Pin Surface Mount Device, Body 3 x 2.5 mm", Package Quantity=3500, Resistance=0.1Ohm, Contact Material=Silver, Current Rating=50mA, Datasheet URL=http://www.omron.com/ecb/products/pdf/en-b3u.pdf, Datasheet Version=Jan-15, Manufacturer URL=http://www.omron.com/, Max Current Rating=50mA, Mounting Technology=SM, Package Reference=B3U-1000, Packaging=TapeandReel, RoHS Compliant=True, Throw Configuration=SPST, Voltage Rating=12V, Voltage Rating (DC)=12V
U: "Magnetoresistive Sensor X, Y, Z Axis 12-LGA _2x2_", Manufacturer=STMicroelectronics, Datasheet=https://www.st.com/content/ccc/resource/technical/document/datasheet/group3/29/13/d1/e0/9a/4d/4f/30/DM00395193/files/DM00395193.pdf/jcr:content/translations/en.DM00395193.pdf, Link=https://www.digikey.com/en/products/detail/stmicroelectronics/LIS2MDLTR/7348328?s=N4IgTCBcDaIDIEkDKYCyAROAVASiAugL5A, Price=$2.75000
U1: "1 A low quiescent current low noise voltage regulator", Manufacturer_Name=STMicroelectronics, Datasheet=https://www.st.com/content/ccc/resource/technical/document/datasheet/72/02/e5/ee/df/36/40/5e/CD00233788.pdf/files/CD00233788.pdf/jcr:content/translations/en.CD00233788.pdf, Manufacturer_Part_Number=LD39100PU33R, Price=$1.15000
U2: "No Description Available", Manufacturer_Name="Bosch Sensortec", Copyright="Copyright (C) 2026 Ultra Librarian. All rights reserved.", Datasheet=https://www.bosch-sensortec.com/media/boschsensortec/downloads/datasheets/bst-bmp581-ds004.pdf, Manufacturer_Part_Number=BMP581
U3: library part CMP-12105-000007-1, "IC MCU 32BIT 512KB FLASH 64LQFP", Ambient Temperature Range High=+85°C, Ambient Temperature Range Low=-40°C, Frequency=180MHz, Manufacturer=ST, Max Junction Temp=+105°C, Max Supply Voltage=3.6V, Min Supply Voltage=1.7V, Package=LQFP64-5W, Temperature="-40°C to +105°C", Automotive=No, Category=IC, ComponentLink2Description=Datasheet, ComponentLink2URL=https://www.st.com/en/microcontrollers-microprocessors/stm32f446re.html, Core Architecture="ARM Cortex-M4", Data Bus Width=32bits, Device Class L1="Integrated Circuits (ICs)", Device Class L2="Embedded Processors and Controllers", Device Class L3=Microcontrollers, Digikey Description="IC MCU 32BIT 512KB FLASH 64LQFP", Height=1.6mm, Interface=I2C,SPI,UART,USART,CAN,USB,LIN,IrDA,I2S,Other, Ipc Land Pattern Name=QFP50P1200X1200X160-64, Lead Free=Yes, Manufacturer Part Number=STM32F446RET6, Memory Size=512KBytes, Memory Type=FLASH, Mouser Description="ARM Microcontrollers - MCU High-performance and DSP with FP, ARM Cortex-M4 MCU with 512 Kbytes Flash, 180 MHz CPU, Art Accelerator, SDRAM", Number Of A/D Converters=3, Number Of Adc Channels=16, Number Of Cores=1, Number Of I2C Channels=4, Number Of I/Os=50, Number Of Pwm Channels=32, Number Of Spi Channels=4, Number Of Timers/Counters=14, Number Of Uart Channels=6, Number Of Usb Channels=2, Octopart=https://octopart.com/stm32f446ret6-stmicroelectronics-52642920, Ram Size=128KBytes, RoHS=TRUE, Standoff Height=0.05mm, Temperature Range High=+105°C, Temperature Range Low=-40°C
U4: "Accelerometer, Gyroscope, 6 Axis Sensor Output", Package=None, Availability=Unavailable, MP=ICM-42688-P, Price=None
X1: library part CMP-003-00015-2, "Ceramic SMD Crystal, 12 MHz, +/- 20 ppm, 18 pF, -20 to 70 degC, 4-Pin SMD, RoHS, Tape and Reel", Case/Package=CSMD, Frequency=12MHz, Frequency Tolerance=20ppm, Load Capacitance=18pF, Manufacturer=Abracon, Max Operating Temperature=70°C, Min Operating Temperature=-20°C, Package Description="4-Pin Surface Mount Device, Body 5 x 3.2 mm", Package Quantity=1000, Package Reference=ABM3B, Resistance=70Ohm, Datasheet URL=http://www.abracon.com/Resonators/abm3b.pdf, Datasheet Version=Aug-15, ESR=70, Manufacturer URL=http://www.abracon.com/, Mounting Technology=SM, Packaging=TapeandReel, Pins=4, RoHS Compliant=True, Tolerance=20ppm

## Via types
v1: diameter 0.6, hole 0.3, L1 (Sig) to L4 (Sig), 45 vias
v2: diameter 0.9, hole 0.4, L1 (Sig) to L4 (Sig), 28 vias
v3: diameter 0.7, hole 0.3, L1 (Sig) to L4 (Sig), 21 vias
v4: diameter 0.6/0.6/0.6/0.6 (per signal layer), hole 0.3, L1 (Sig) to L4 (Sig), 9 vias

## Nets (pads, with @x,y where several pads share a name; then routed paths per layer and width w, separated by ;. In a path a pad name is that pad's centre, name@x,y a point inside that pad or via, vN(x,y) a via of type N, cw(c..) or ccw(c..) an arc to the next point about the centre after c; other vN are vias at no path point)
3V3: C1.1 C2.1 C3.1 C5.1 C6.1 C8.1 C9.1 C10.1 C11.1 C12.1 C13.1 C14.1 C15.1 C16.1 C19.1 C20.1 C21.1 DS1.1 J1.4 J3.1 R1.2 R2.2 R3.2 R4.2 R5.2 R6.2 R8.1 R12.1 R13.1 U1.4 U2.1 U2.5 U2.6 U2.10 U3.1 U3.13 U3.19 U3.32 U3.48 U3.64 U4.5 U4.8 U.3 U.9 U.10 | length 246.5
  L1 (Sig) w0.2: 84.05,93.17 v1(84.62,93.74) ; v1(86.28,95.36) 86.34,95.3 86.34,95.24 86.62,95.52 88.57,95.52 J3.1
  L1 (Sig) w0.25: 94.5,80.3 95.5,80.3 R8.1@95.5,81.08 ; 96.5,73.337 96.732,73.569 U3.13 ; 100.15,66.85 100.372,67.072 C12.1 100.319,68.546 100.319,68.887 100.501,69.069 U3.19 ; U4.5 103.009,64.57 103.05,64.529 C19.1 103.06,63.51 103.06,62.68 ; J1.4 106.035,86.365 106.23,86.17 C1.1 ; U3.32@107.061,69.469 107.001,69.529 U3.32 107.001,70.701 107.2,70.9 108.64,70.9 109.18,70.36 109.86,70.36 110.625,69.595 U2.5 ; C13.1 U2.6@110.361,68.707 ; U3.48 109.795,79.569 109.855,79.629 ; R12.1@111.448,74.041 R12.1 113.359,74.041 114.4,73 ; R13.1@111.448,74.803 R13.1 113.747,74.803 114.4,74.15 ; v3(111.58,66.02) 111.6,66.04 111.6,66.2 111.575,66.225 C9.1 111.575,67.191 111.625,67.241 U2.10 ; C2.1 112.299,82.847 112.544,83.092 U.10 ; U2.1 112.206,68.203 112.268,68.141 C8.1 112.885,68.25 114.4,68.25 ; 113.5,85.36 113.541,85.319 C6.1 113.578,83.909 U.9 ; U.3 114.078,80.754 C5.1 114.092,80.74 v1(115.18,80.74) ; v1(114.38,75.44) 114.4,75.42 114.4,74.15 ; 114.4,72 114.4,73 ; v1(117.48,81.66) 118.1,82.28 118.1,82.52 ; 114.4,73 114.4,74.15
  L1 (Sig) w0.273: C11.1@95.5,79.448 95.5,80.3 ; C11.1 96.194,79.444 96.319,79.569 U3.1 ; 99.5,82.25 99.501,82.249 U3.64
  L1 (Sig) w0.3: C16.1 96.5,73.337 ; 98.65,84.95 98.668,84.95 99.269,84.35 ; 99.5,82.25 99.118,82.632 C15.1 99.118,84.199 99.269,84.35 ; R4.2 100.896,84.5 ; R3.2 103.828,83.928 103.7,83.8 ; U4.8 105.622,65.675 C21.1 106.221,65.721 106.25,65.75 ; C1.1 R2.2 105.479,84.079 105.2,83.8 ; U3.32@107.061,69.469 107.903,69.469 108.146,69.226 C13.1 108.146,68.004 108.15,68 ; R6.2 107.881,84.181 107.5,83.8 ; 109.855,79.629 110.051,79.825 C14.1 110.48,79.835 110.48,82.48 110.847,82.847 C2.1 111.862,83.822 112.083,84.043 R1.2 ; U2.6@110.361,68.707 U2.6 ; R5.2 110.432,84.592 109.64,83.8 107.5,83.8 ; 99.269,84.35 99.419,84.5 100.896,84.5 ; 100.896,84.5 101.6,84.5 102.3,83.8 103.7,83.8 ; 103.7,83.8 105.2,83.8 ; 105.2,83.8 107.5,83.8
  L1 (Sig) w0.4: 84.05,91.83 84.05,93.17 ; 92.75,71.95 93.354,72.554 C10.1 94.989,72.554 95.504,73.069 C16.1 ; 93.5,80.3 94.5,80.3 ; 98.1,85.5 98.65,84.95 ; 99.75,66.45 100.15,66.85 ; 106.25,65.75 106.65,65.75 ; 108.15,67.4 108.15,68 ; R1.2 112.104,85.36 113.5,85.36 117.38,85.36 118.1,84.64 118.1,82.52 ; 114.4,71.25 114.4,72
  L1 (Sig) w0.5: 91.8,80.3 93.5,80.3 ; 92.05,71.25 92.75,71.95 ; 97.5,86.1 98.1,85.5 ; 99.1,65.8 99.75,66.45 ; 103.06,62.68 103.07,62.67 103.07,62.28 ; 106.65,65.75 106.95,65.75 ; 108.15,66.95 108.15,67.4 ; 111.6,63.15 v3(111.6,64.6) ; 114.4,70.5 114.4,71.25
  L1 (Sig) w0.75: 84.05,89.91 84.05,91.83 ; 89.2,80.3 91.8,80.3 ; 91.3,70.5 92.05,71.25 ; 97,86.6 97.5,86.1 ; 98.2,64.9 99.1,65.8 ; 103.07,62.28 103.08,62.27 103.08,61.85 ; 106.95,65.75 108.05,65.75 108.15,65.65 ; 108.15,66.3 108.15,66.95 ; 114.4,64.6 114.4,68.25 114.4,70.5 ; C3.1 120.598,69.7 122.299,69.7 ; DS1.1 122.289,69.69 122.299,69.7 ; 124.5,69.2 124,69.7 122.299,69.7
  L1 (Sig) w1: 84.05,89.91 84.05,87.46 ; 89.2,80.3 84.05,80.3 ; 91.3,70.5 89.975,69.175 89.825,69.175 ; 97,86.6 96.14,87.46 84.05,87.46 ; 98.2,64.9 96.15,62.85 ; 103.08,61.85 103.075,61.845 103.075,61 ; 108.15,66.3 108.15,65.65 108.15,61 ; 111.647,63.103 111.647,61 ; 114.4,64.6 114.4,61.05 114.35,61 ; 124.5,69.2 125.4,68.3 125.4,65.4 124,64 123,64 120,61 114.35,61 ; 84.05,80.3 84.05,87.46 ; 84.05,80.3 84.05,74.95 89.825,69.175 ; 89.825,69.175 96.15,62.85 ; 96.15,62.85 98,61 103.075,61 ; 103.075,61 108.15,61 ; 108.15,61 111.647,61 ; 111.647,61 114.35,61
  L4 (Sig) w0.2: v1(84.62,93.74) 84.64,93.76 84.68,93.76 v1(86.28,95.36)
  L4 (Sig) w0.25: v3(111.58,66.02) 111.6,66 v3(111.6,64.6) ; v1(114.38,75.44) 114.38,76.82 116.74,79.18 116.74,80.24 ; v1(115.18,80.74) 116.24,80.74 116.74,80.24 ; v1(117.48,81.66) 116.74,80.92 116.74,80.24
5V_LDO_VIN: C7.1 J2.A4_B9 J2.B4_A9 U1.1 U1.6 | length 11.7
  L1 (Sig) w0.2: J2.B4_A9 121.684,78.232 122.391,78.232 122.645,77.978
  L1 (Sig) w0.3: J2.A4_B9 122.146,73.546 122.4,73.8 122.82,73.8 123,73.98 ; 122.645,77.978 123.19,77.978
  L1 (Sig) w0.4: 123,73.98 123.12,74.1 125.476,74.1 125.476,77.343 124.841,77.978 123.19,77.978
CC1: J2.A5 R11.1 | length 3.7
  L1 (Sig) w0.25: R11.1 118.235,75.342 119.602,75.342 119.608,75.348 120.26,74.696 J2.A5
CC2: J2.B5 R10.1 | length 3.4
  L1 (Sig) w0.25: R10.1 118.228,77.661 118.263,77.696 J2.B5
DEB_LED_A: DS2.1 U3.33 | length 1.5
  L1 (Sig) w0.25: U3.33 110.442,72.069 DS2.1
DEB_LED_K: DS2.2 R15.1 | length 1.4
  L1 (Sig) w0.25: R15.1 111.885,70.993 112.002,71.11 DS2.2
GND: C1.2 C2.2 C3.2 C4.2 C5.2 C6.2 C7.2 C8.2 C9.2 C10.2 C11.2 C12.2 C13.2 C14.2 C15.2 C16.2 C17.2 C18.2 C19.2 C20.2 C21.2 C22.2 C23.2 Designator9.1 Designator10.1 Designator11.1 Designator12.1 Designator13.1 Designator14.1 J1.6 J1.P1 J1.P2 J1.P3 J1.P4 J1.SWA J2.A1_B12 J2.B1_A12 J2.SH1 J2.SH2 J2.SH3 J2.SH4 J3.5 R7.2 R9.2 R10.2 R11.2 R15.2 SW1.2 U1.2 U2.3 U2.8 U2.9 U3.12 U3.18 U3.31 U3.47 U3.63 U4.6 U4.7 U4.9 U4.11 U.6 U.8 X1.2 X1.4 | length 265.7
  L1 (Sig) w0.2: J3.5 91.402,95.498 92.64,94.26 v1@92.64,92.78 ; U4.6 103.509,65.909 103.775,66.175 104,66.175 ; U4.7 104.009,66.166 104,66.175 ; U4.9 104,66.175 ; U2.8 U2.9 ; v1@90.379,74.339 v1(90.38,74.34)
  L1 (Sig) w0.25: 96.5,74.237 96.668,74.069 U3.12 ; C12.2 99.42,68.545 99.42,68.822 99.667,69.069 99.822,69.069 100.001,69.248 U3.18 ; U3.63 100.001,82.914 C15.2 R9.2 ; U3.31 106.501,71.068 106.807,71.374 109.22,71.374 109.601,70.993 R15.2 ; U.8 114.078,83.413 114.441,83.776 C6.2 ; U.6 114.84,82.582 115.261,83.003 C4.2
  L1 (Sig) w0.254: 76,59 ccw(c80,59) 80,55 124,55 ccw(c124,59) 128,59 128,100 ccw(c124,100) 124,104 80,104 ccw(c80,100) 76,100 76,59
  L1 (Sig) w0.3: X1.4 88.932,78.899 89.362,79.329 C22.2 ; C17.2 C16.2 96.5,74.237 ; C20.2 103.95,64.469 C19.2 ; C19.2 v1(104.77,63.52) ; C20.2@103.959,64.52 104.009,64.57 U4.7 ; U4.11 105.385,67.175 105.668,66.892 C21.2 ; U3.31 106.501,68.766 C18.2 C13.2 ; U3.47 109.965,79.069 110.109,78.925 C14.2 ; U2.8 110.625,66.852 C9.2 110.675,65.525 110.9,65.3 112.4,65.3 112.776,65.676 C8.2 ; v1@111.175,78.925 v1(111.2,78.95) ; U2.3 112.25,69.851 v1(112.25,70.2)
  L1 (Sig) w0.4: X1.4 88.932,77.216 89.313,76.835 92.71,76.835 92.932,76.613 X1.2 92.932,74.454 93.382,74.004 C10.2 94.594,74.237 C16.2 ; C23.2 v1@90.379,74.339 ; C14.2 v1@111.175,78.925
  L1 (Sig) w0.5: v1@87.6,78 87.622,77.978 X1.4 ; v1@94.82,78.56 94.836,78.544 C11.2 ; C12.2 99.472,67.748 v1(99.5,67.72) ; R9.2 v1(100.769,83.669) ; v1(101.085,86.515) 101.104,86.534 101.104,87.489 J1.P4 ; C21.2 106.419,66.621 v1(106.44,66.6) ; C1.2 107.13,84.57 v4(107.15,84.55) ; C13.2 107.246,67.974 v1(107.26,67.96) ; v1(108.15,86.55) 108.169,86.569 108.169,87.504 J1.6 ; v1(109.92,66.8) 109.922,66.802 C9.2 ; C2.2 111.862,81.268 v1(111.88,81.25) ; C8.2 113.479,67.241 v1(113.5,67.22) ; v1(113.35,79.85) C5.2 ; C6.2 114.546,83.946 115.22,84.62 v1(115.22,84.64) ; v1(115.63,73.33) 115.644,73.316 C7.2 ; C4.2 115.696,83.756 v1(116,84.06) ; v1(116.2,75.39) 116.206,75.384 R11.2 ; v1(116.36,77.71) 116.364,77.706 R10.2 R10.2@117.258,77.706 ; v1(120.425,72.696) 121.146,72.696 121.196,72.746 J2.A1_B12 ; v1(120.5,67.3) 120.5,68.298 C3.2 ; v1(120.5,79.15) 120.504,79.146 J2.B1_A12
  other v1: 120.35,64.35 87.605,78.005 94.825,78.565 88.589,83.811 88.6,84.7 92.629,92.791
  other v2: 85,59 90,59 95,59 100,59 105,59 110,59 115,59 120,59 90,63 120,63 100.067,63.046 90,67 95,67 80,68 85,68 95,71 80,73 80,78 119,79 80,83 119,83 80,88 119,88 124,88 80,93 119,93 124,93 119,98
  other v4: 126.4,70.7 120.6,71.55 122.05,81.35 126.35,81.4 113.7,91.9 113.85,98.1 113.95,102.3 97.3,102.6
I2C1_SCL: R12.2 U2.2 U3.37 U.1 | length 24
  L1 (Sig) w0.25: v3(107.188,74.93) 107.188,74.549 107.668,74.069 U3.37 109.847,74.069 109.875,74.041 ; R12.2@110.548,74.041 110.548,73.533 110.802,73.279 112.522,73.279 112.903,72.898 112.903,69.342 112.264,68.703 U2.2 ; v3(113.03,80.772) 113.06,80.772 113.078,80.754 U.1
  L1 (Sig) w0.3: 109.875,74.041 R12.2@110.548,74.041
  L4 (Sig) w0.25: v3(107.188,74.93) 107.188,79.883 107.696,80.391 110.704,80.391 112.638,80.391 113.019,80.772 v3(113.03,80.772)
I2C1_SDA: R13.2 U2.4 U3.38 U.4 | length 22.9
  L1 (Sig) w0.25: U3.38 109.875,74.569 110.109,74.803 ; v3(110.502,76.569) 110.502,74.849 R13.2@110.548,74.803 ; U2.4 111.125,70.115 v3(111.13,70.12) ; U.4 115.248,81.572 115.82,81 115.82,79.82 v3(115.86,79.78)
  L1 (Sig) w0.3: 110.109,74.803 R13.2@110.548,74.803
  L4 (Sig) w0.25: v3@110.49,76.569 110.49,77.343 111.647,78.5 114.58,78.5 v3(115.86,79.78) ; v3(110.502,76.569) 111.991,76.569 112.44,76.12 112.44,73.69 111.125,72.375 111.125,70.125 v3(111.13,70.12)
IMU_CS: U3.17 U4.12 | length 10.6
  L1 (Sig) w0.25: U3.17 99.501,70.851 100.719,72.069 v3(103.509,72.069) ; U4.12 104.501,67.832 v3(104.501,68.707)
  L4 (Sig) w0.25: v3(103.509,72.069) 104.501,71.077 v3(104.501,68.707)
IMU_INT: U3.20 U4.4 | length 5.2
  L1 (Sig) w0.25: U3.20 101.001,69.121 101.001,66.512 101.838,65.675 U4.4
IMU_MISO: U3.22 U4.1 | length 3
  L1 (Sig) w0.25: U3.22 102.001,68.259 102.344,67.916 U4.1
IMU_MOSI: U3.23 U4.14 | length 2.9
  L1 (Sig) w0.25: U3.23 102.501,68.619 103.009,68.111 U4.14
IMU_SCLK: U3.21 U4.13 | length 7.1
  L1 (Sig) w0.25: U3.21 101.501,71.247 101.628,71.374 v3(102.501,71.374) ; v3(103.505,68.707) 103.509,68.703 U4.13
  L4 (Sig) w0.25: v3(102.501,71.374) 103.251,71.374 103.505,71.12 v3(103.505,68.707)
MAG_C1: C4.1 U.5 | length 1.1
  L1 (Sig) w0.25: U.5 115.675,82.082 C4.1
MCU_BOOT0: R9.1 U3.60 | length 1.4
  L1 (Sig) w0.25: U3.60 101.501,82.324 101.669,82.492 R9.1
MCU_NRST: C17.1 J3.3 R8.2 SW1.1 U3.7 | length 29.5
  L1 (Sig) w0.25: J3.3 90.132,95.772 89.2,94.84 89.2,90.1 v1(90.76,88.54) ; v1(91.52,86.2) 91.52,84.78 91.952,84.348 SW1.1 ; R8.2 96.166,81.984 96.55,81.6 96.55,81.123 97.409,80.264 98.186,80.264 98.9,79.55 98.9,77.15 98.319,76.569 U3.7 96.732,76.569
  L1 (Sig) w0.3: SW1.1@93.14,84.328 94.996,84.328 95.504,83.82 R8.2 ; C17.1 96.057,76.569 96.732,76.569
  L4 (Sig) w0.25: v1(90.76,88.54) 91.56,87.74 91.56,86.24 v1(91.52,86.2)
MCU_OSC_IN: C22.1 U3.5 X1.3 | length 7.2
  L1 (Sig) w0.25: 96.52,77.597 96.548,77.569 U3.5
  L1 (Sig) w0.3: C22.1 91.522,79.34 92.47,79.34 92.932,78.878 X1.3 ; X1.3@93.002,77.908 96.209,77.908 96.52,77.597
MCU_OSC_OUT: R14.1 U3.6 | length 9.4
  L1 (Sig) w0.25: R14.1 90.508,73.1 91.48,73.1 v3(91.49,73.11) ; v3(94.615,76.581) 94.603,76.569 94.594,76.569 95.114,77.089 97.481,77.089 U3.6
  L4 (Sig) w0.25: v3(91.49,73.11) 91.5,73.1 92.098,73.1 92.58,73.582 94.615,75.617 v3(94.615,76.581)
MCU_VCAP1: C18.1 U3.30 | length 1.6
  L1 (Sig) w0.3: C18.1 105.642,68.807 105.642,68.89 106.001,69.249 U3.30
NetDS1_2: DS1.2 R7.1 | length 2.6
  L1 (Sig) w0.3: R7.1 121.637,66.037 122.289,66.689 DS1.2
SD_CLK: J1.5 U3.34 | length 21.7
  L1 (Sig) w0.25: v1(105.7,73.15) 106.3,72.55 108.982,72.55 U3.34 ; v1(107.05,86.5) 107.05,86.65 107.081,86.65 107.092,86.662 107.092,87.528 J1.5
  L4 (Sig) w0.25: v1(105.7,73.15) 103.9,74.95 103.9,86.15 104.25,86.5 v1(107.05,86.5)
SD_CS: J1.2 R3.1 U3.29 | length 19
  L1 (Sig) w0.25: v3(102.9,84.6) 102.928,84.628 R3.1 102.928,85.91 103.505,86.487 103.735,86.717 103.735,87.47 J1.2 ; v3(104.3,73) 105.501,71.799 U3.29
  L4 (Sig) w0.25: v3(102.9,84.6) 102.87,84.57 102.87,74.43 v3(104.3,73)
SD_DAT1: J1.8 R5.1 | length 2.6
  L1 (Sig) w0.25: R5.1 109.532,85.882 110.435,86.785 J1.8
SD_DAT2: J1.1 R4.1 | length 2.6
  L1 (Sig) w0.25: R4.1 101.796,85.896 102.635,86.735 102.635,87.47 J1.1
SD_DETECT: J1.SWB R1.1 U3.56 | length 13
  L1 (Sig) w0.25: U3.56 103.501,82.701 103.8,83 110.159,83 111.183,84.024 R1.1 111.183,85.983 111.385,86.185 J1.SWB
SD_MISO: J1.7 R6.1 U3.35 | length 18.7
  L1 (Sig) w0.25: v3(105.41,76.708) 105.41,74.803 107.144,73.069 U3.35 ; v3(108.8,84.55) 108.781,84.569 R6.1 108.781,86.429 109.235,86.883 109.235,87.47 J1.7
  L4 (Sig) w0.25: v3(105.41,76.708) 105.41,80.01 108.8,83.4 v3(108.8,84.55)
SD_MOSI: J1.3 R2.1 U3.36 | length 17.5
  L1 (Sig) w0.25: v3(104.6,84.6) 104.579,84.621 R2.1 104.579,86.418 104.835,86.674 104.835,87.47 J1.3 ; v3(106.299,75.565) 106.299,74.676 107.406,73.569 U3.36
  L4 (Sig) w0.25: v3(104.6,84.6) 104.579,84.579 104.579,76.269 105.283,75.565 v3(106.299,75.565)
SWCLK: J3.4 U3.49 | length 40.7
  L1 (Sig) w0.25: J3.4 89.14,98.074 89.14,99.98 90.1,100.94 92.74,100.94 93.7,99.98 93.7,88.65 v1(93.6,88.55) ; v1(93.6,86.25) 93.6,86 94.3,85.3 95.75,85.3 96.58,84.47 96.58,82.52 99,80.1 106.262,80.1 107.001,80.839 U3.49
  L4 (Sig) w0.25: v1(93.6,86.25) v1(93.6,88.55)
SWDIO: J3.2 U3.46 | length 40.5
  L1 (Sig) w0.25: v1(87.24,89.84) 85.58,91.5 85.58,96.14 86.9,97.46 88.484,97.46 J3.2 ; v1(100.88,79.16) 101.471,78.569 U3.46
  L4 (Sig) w0.25: v1(87.24,89.84) 87.32,89.84 87.34,89.86 87.36,89.84 95.5,89.84 98.06,87.28 98.06,81.98 v1(100.88,79.16)
SWO: J3.6 U3.55 | length 27.7
  L1 (Sig) w0.25: J3.6 92.064,96.42 v1(92.84,96.42) ; v1(94.75,86.3) 95.05,86 96.05,86 97.35,84.7 97.35,82.5 99.3,80.55 103.752,80.55 104.001,80.799 U3.55 ; v1(94.75,88.55) v1(94.75,96.47)
  L4 (Sig) w0.25: v1(92.84,96.42) 92.86,96.42 92.94,96.34 93.08,96.48 93.09,96.47 v1(94.75,96.47) ; v1(94.75,86.3) v1(94.75,88.55)
USB_N: J2.A7 J2.B7 U3.44 | length 20.3
  L1 (Sig) w0.273: U3.44 113.059,77.569 114.432,76.196 J2.A7 123.44,76.196 v3(123.444,76.2) ; J2.B7 122.416,75.196 122.936,74.676 124.206,74.676 v3(124.587,75.057)
  L4 (Sig) w0.273: v3(123.444,76.2) 123.952,76.2 124.587,75.565 v3(124.587,75.057)
USB_P: J2.A6 J2.B6 U3.45 | length 20.6
  L1 (Sig) w0.273: U3.45 113.233,78.069 114.606,76.696 J2.B6 122.543,76.696 123.063,77.216 124.333,77.216 124.587,76.962 124.587,76.327 123.698,75.438 123.063,75.438 122.805,75.696 J2.A6
XTAL_DAMPING_R: C23.1 R14.2 X1.1 | length 2.9
  L1 (Sig) w0.25: R14.2 88.764,73.146 88.764,73.331 88.516,73.579 C23.1 88.516,75.162 X1.1
pads on no net: J2. J2.A8 J2.B8 J3.7 J3.8 J3.9 J3.10 J3.11 J3.12 J3.13 U1.3 U1.5 U1.7 U2.7 U3.2 U3.3 U3.4 U3.8 U3.9 U3.10 U3.11 U3.14 U3.15 U3.16 U3.24 U3.25 U3.26 U3.27 U3.28 U3.39 U3.40 U3.41 U3.42 U3.43 U3.50 U3.51 U3.52 U3.53 U3.54 U3.57 U3.58 U3.59 U3.61 U3.62 U4.2 U4.3 U4.10 U.2 U.7 U.11 U.12

## Polygon pours and split planes (outlines as drawn)
GND on L1 (Sig) "NONET_L-01_P-001" (solid, pour order 12): 120.65,65.45 120.75,65.35 120.75,64.15 120.55,63.95 117.85,63.95 117.65,64.15 117.65,66.94 118.15,66.94 118.15,64.85 118.35,64.65 119.65,64.65 119.85,64.85 119.85,65.35 119.95,65.45
3V3 on L1 (Sig) "NONET_L-01_P-001" (solid, pour order 22): 118.6,69.04 118.6,69.9 119,70.3 121.1,70.3 121.2,70.2 121.2,69.3 121.1,69.2 119.9,69.2 119.74,69.04
5V_LDO_VIN on L1 (Sig) "NONET_L-01_P-001" (solid, pour order 21): 117.7,73.9 122.1,73.9 122.2,73.8 122.2,73.3 122.1,73.2 119.5,73.2 118.7,72.4 117.3,71 117.3,69.1 117.2,69 116.4,69 116.3,68.9 116.3,67.1 116.5,66.9 117.2,66.9 117.3,66.8 117.3,66.2 117.2,66.1 115.8,66.1 115.5,66.4 115.5,71.5 116.4,72.4 117.3,72.4 117.7,72.8
GND on L1 (Sig) "NONET_L-01_P-001" (solid, pour order 14): 121,81.45 121.25,81.7 121.3,81.7 127.15,81.7 127.4,81.45 127.4,79.8 127.25,79.65 121.25,79.65 121,79.9
GND on L1 (Sig) "NONET_L-01_P-001" (solid, pour order 15): 120.5,71 120.25,71.25 120.25,72 120.45,72.2 127.2,72.2 127.35,72.05 127.35,70.5 127.2,70.35 122.65,70.35 122,71
GND on L1 (Sig) "NONET_L-01_P-001" (solid, pour order 17): 111.65,92.47 113.05,92.47 113.05,97.5 111.8,97.5 111.8,98.8 113.05,98.8 113.05,100.7 111.65,100.7 111.65,103.65 114.25,103.65 114.25,91.25 111.65,91.25
GND on L1 (Sig) "NONET_L-01_P-001" (solid, pour order 18): 97.2,101.65 96.95,101.9 96.95,103.65 97,103.7 99.7,103.7 99.65,103.65 99.65,101.65
GND on L1 (Sig) "NONET_L-01_P-001" (solid, pour order 19): 88.4,83.35 88.2,83.55 88.2,85.05 88.4,85.25 90.15,85.25 90.3,85.1 90.3,83.5 90.15,83.35
GND on L3 (GND) "NONET_L-01_P-001" (solid, pour order 9): 77,100.46 cw(c79.54,100.46) 79.54,103 124.46,103 cw(c124.46,100.46) 127,100.46 127,58.54 cw(c124.46,58.54) 124.46,56 79.54,56 cw(c79.54,58.54) 77,58.54 77,65
GND on L2 (GND) "NONET_L-01_P-001" (solid, pour order 8): 77,100.46 cw(c79.54,100.46) 79.54,103 124.46,103 cw(c124.46,100.46) 127,100.46 127,58.54 cw(c124.46,58.54) 124.46,56 79.54,56 cw(c79.54,58.54) 77,58.54 77,65

## Silkscreen, mask and mechanical layers (free items; w line width, h text height)
Top Overlay:
  text "SWD" at 86.07,101.05 h1
  text "SD CARD" at 113.25,89.25 h1
  text "MAG" at 117.24,82.32 h0.6 r90
  text "USB" at 121.43,82.25 h1
  text "NRST" at 89.45,81.49 h1
  text "XTAL" at 86.78,75.9 h0.6 r90
  text "BAR" at 108.84,68.26 h0.6 r270
  text "IMU" at 100.75,63.75 h0.6
  text "LDO" at 115.65,63.6 h0.6
  text "FCU  / REV A" at 80.16,62.4 h1.2

## Text inside footprints (layer, text, board x,y; h text height)
J1: Top Assembly "PCB Edge" at 107.878,104.665 h0.61 r180
J2: Top Assembly "PCB EDGE" at 128.825,81.346 h0.41 r90
U2: Top Assembly "*" at 112.012,68.207 h1.27 r180